# Altium PCB PCB_Negativo.PcbDoc
Units mm, origin at the board's own origin, x right, y up, seen from the top; angles counter-clockwise.
Board outline 111.51 x 148.08 mm, 3 copper layers (Top Layer, Fill, Bottom Layer), stack 0.488 mm thick; 88 components, 0 nets, 340 pads, 12 vias.
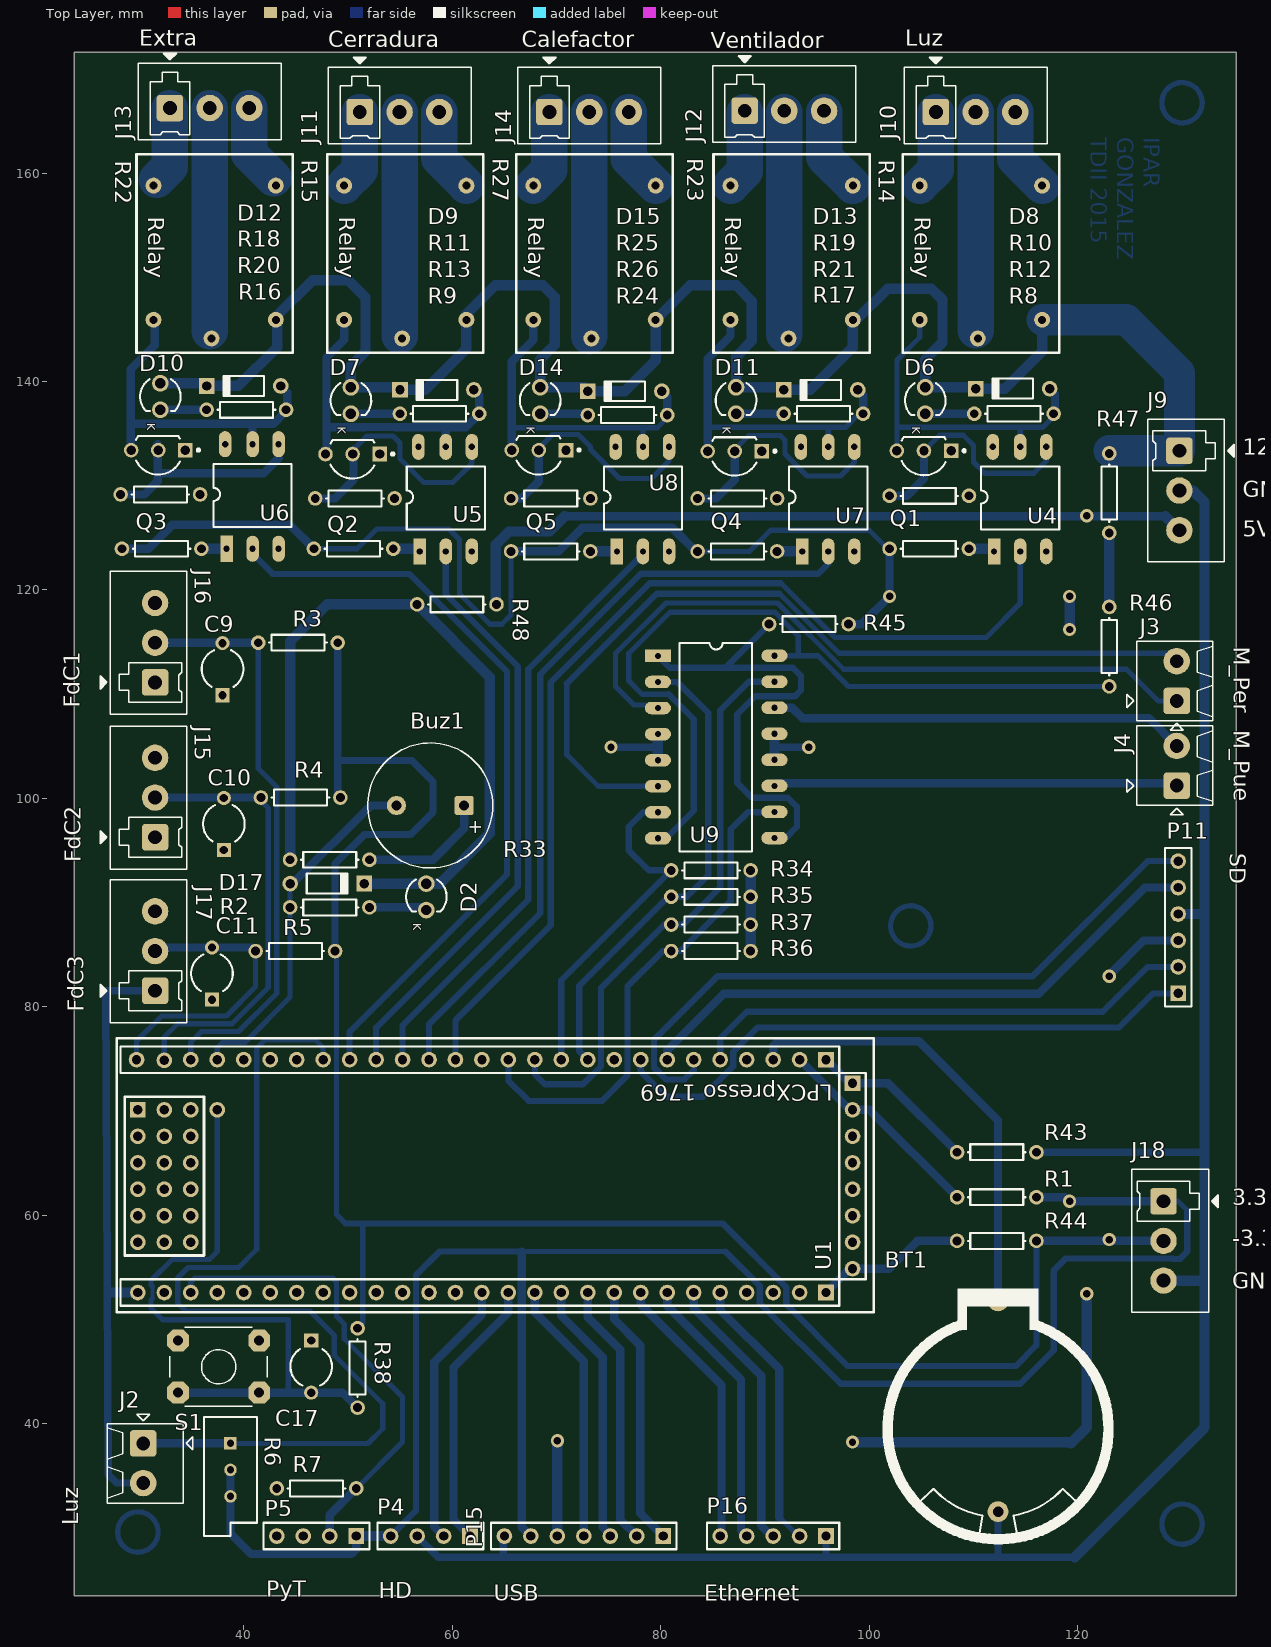
[diagram p0: Top Layer view]
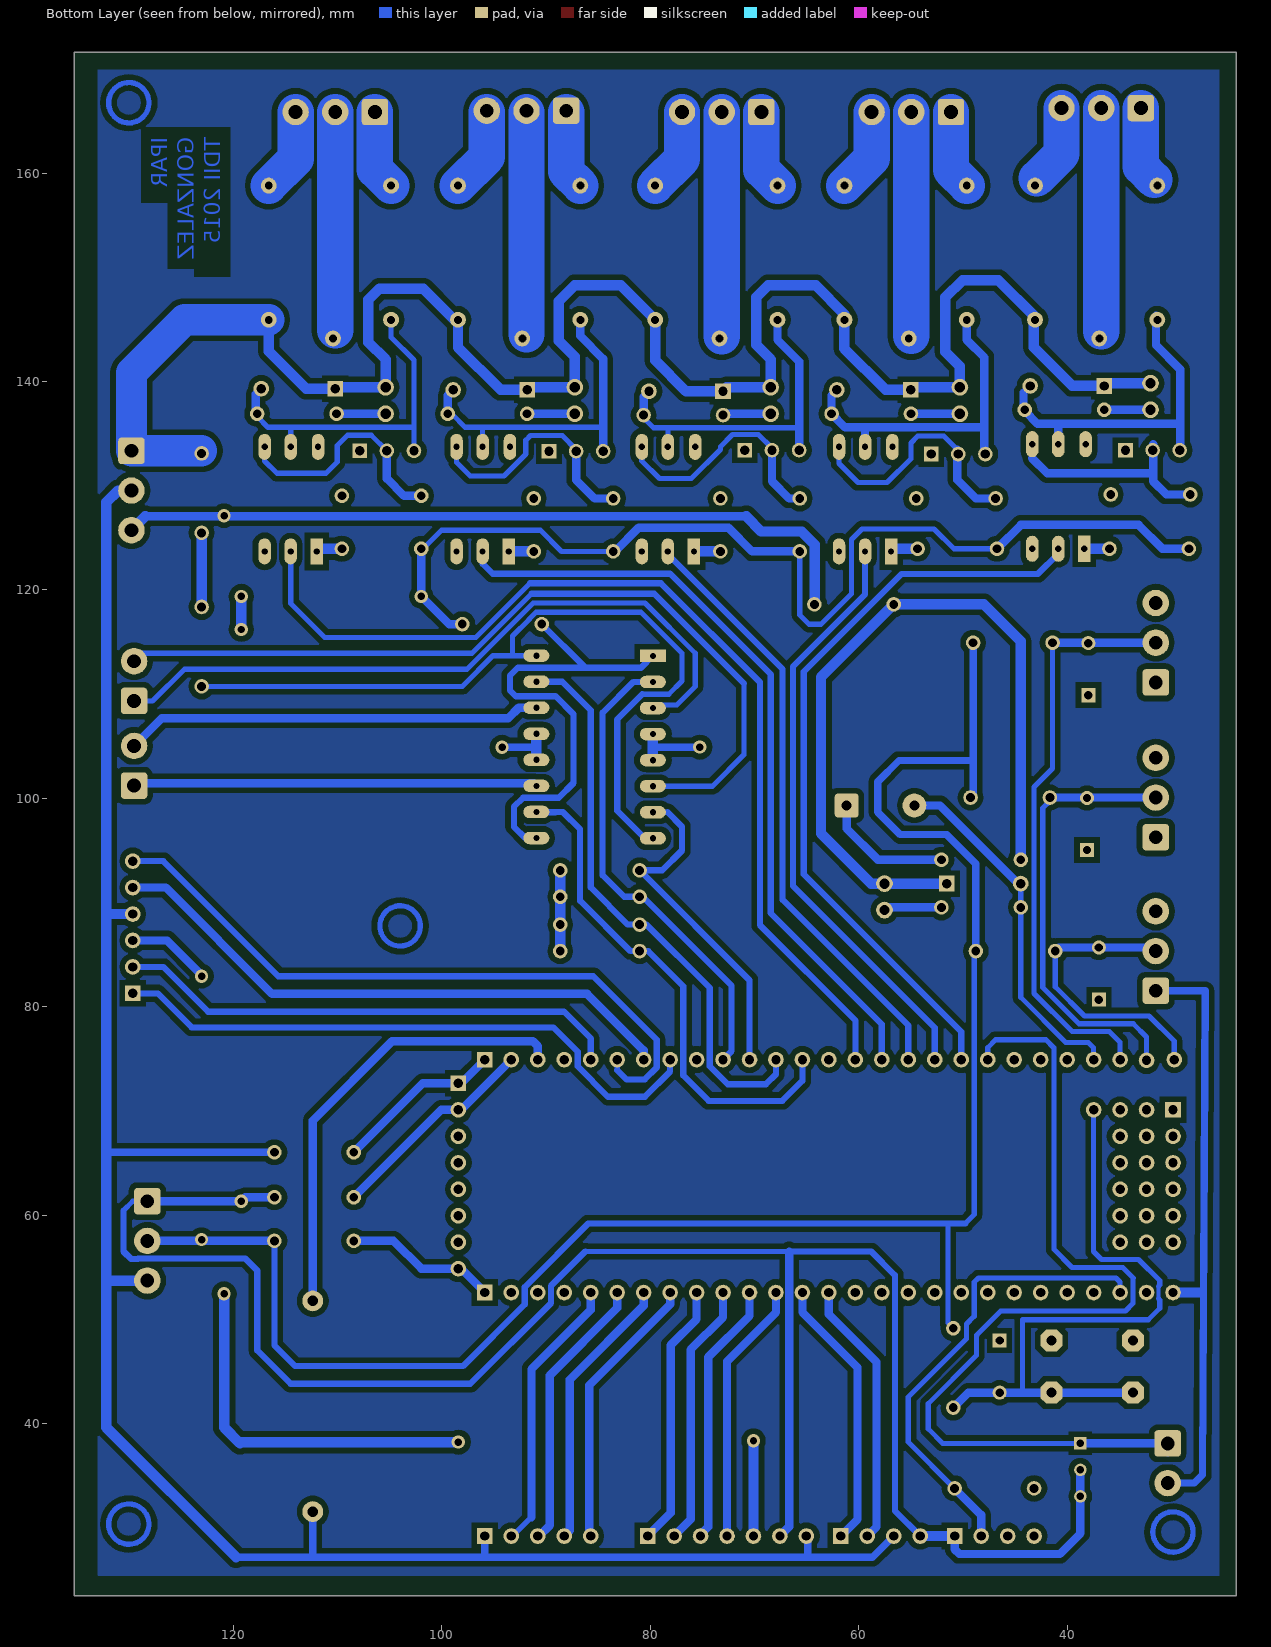
[diagram p1: Bottom Layer view, seen from below]
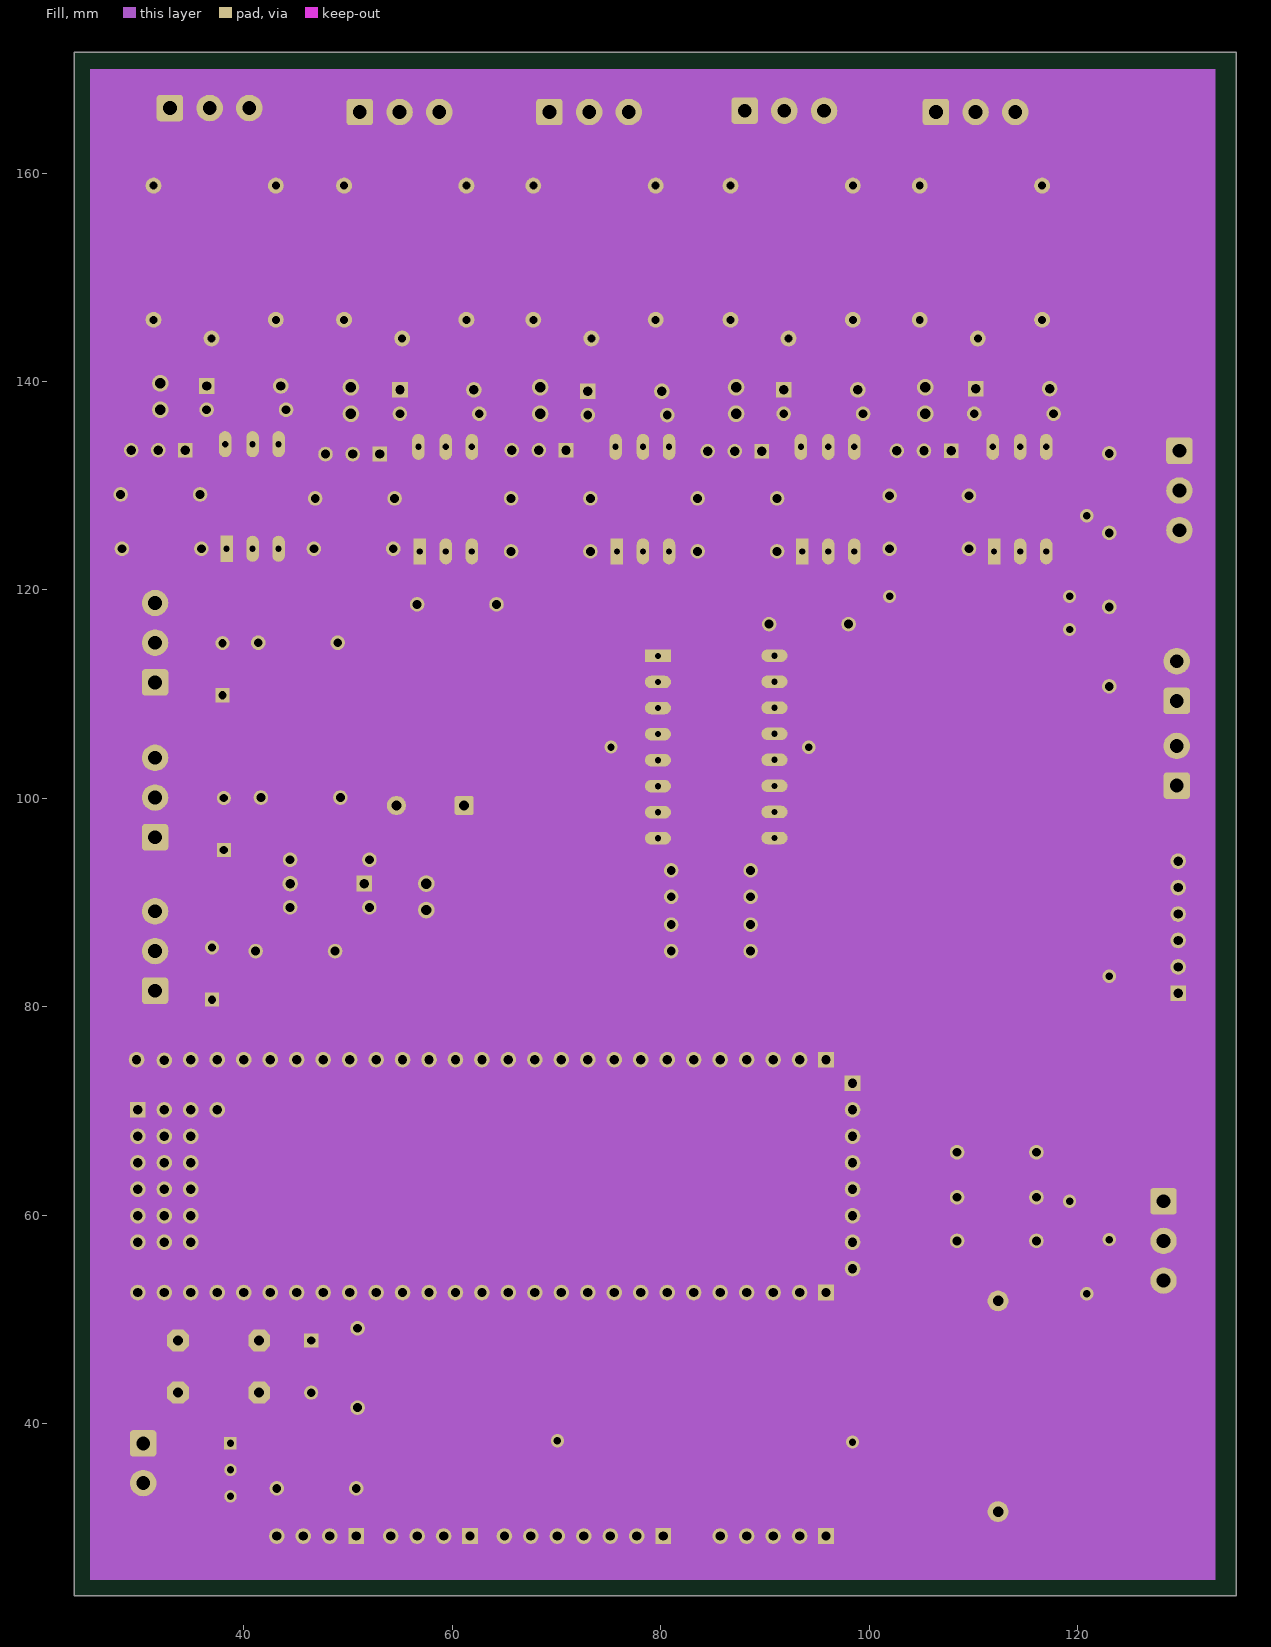
[diagram p2: Fill]

## Layer stack, top to bottom
Top Solder: solder mask 0.0102, Solder Resist, Dk 3.5
Top Layer: signal copper 0.0356
Dielectric 1: core 0.254, FR-4, Dk 4.2
Fill: signal copper 0.036
Dielectric 2: prepreg 0.127, Dk 4.2
Bottom Layer: signal copper 0.0356
Bottom Solder: solder mask 0.0102, Solder Resist, Dk 3.5

## Board outline
23.749,23.495 135.255,23.495 135.255,171.577 23.749,171.577

## Design rules (kind name [scope] priority, off if disabled: settings)
Clearance [All] p1: gap=0.55
PolygonConnect [All] p1: connectstyle=Relief reliefconductorwidth=0.254 reliefentries=4 polygonreliefangle="90 Angle" airgapwidth=0.254
RoutingVias [All] p1: holewidth=0.711 width=1.27 viastyle="Through Hole" minholewidth=0.711 minwidth=1.27 maxholewidth=0.711 maxwidth=1.27
SolderMaskExpansion [All] p1: expansion=0.102
Width [All] p1: maxlimit=3.5 minlimit=0.254 preferedwidth=0.5 midlayer1_maxwidth=0.254 midlayer1_prefwidth=0.254 minimp=50.000000 maximp=50.000000 favimp=50.000000
30 further rules are at their usual default settings.

## Components (designator, comment, footprint, x,y, rotation, side; value= is the part's Value field where it differs from the comment)
BT1 "120591-1" TECO-120591-1-2_V 112.384,39.496 r90 top
Buz1 "Alternate part: 3100-932" BUZZER_12.0X8.5MM 57.901,99.313 r180 top
C9 "Cap2" CAPR5-4X5 37.962,112.394 r90 top
C10 "Cap2" CAPR5-4X5 38.089,97.535 r90 top
C11 "Cap2" CAPR5-4X5 36.946,83.184 r90 top
C17 "Cap2" CAPR5-4X5 46.471,45.465 r270 top
D2 "LED1" "Type 3mm" 57.52,90.55 r270 top
D6 "LED1" "Type 3mm" 105.399,138.175 r270 top
D7 "LED1" "Type 3mm" 50.281,138.175 r270 top
D8 "1N4148" DO-35 113.781,139.318 r180 top
D9 "1N4148" DO-35 58.536,139.191 r180 top
D10 "LED1" "Type 3mm" 31.993,138.556 r270 top
D11 "LED1" "Type 3mm" 87.238,138.175 r270 top
D12 "1N4148" DO-35 39.994,139.572 r180 top
D13 "1N4148" DO-35 95.366,139.191 r180 top
D14 "LED1" "Type 3mm" 68.442,138.175 r270 top
D15 "1N4148" DO-35 76.57,139.064 r180 top
D17 "1N4148" DO-35 47.995,91.82 r0 top
J2 "Stackable ScrewTerm" 2P_PCB_ScrewTerm_90S_3.81MM 30.342,38.099 r180 top
J3 "Stackable ScrewTerm" 2P_PCB_ScrewTerm_90S_3.81MM 129.529,109.346 r0 top
J4 "Stackable ScrewTerm" 2P_PCB_ScrewTerm_90S_3.81MM 129.529,101.218 r0 top
J9 "3P_TERM BLOCK HEADER" 3P_PCB_TERM_BLOCK_HDR 129.783,129.539 r0 top
J10 "3P_TERM BLOCK HEADER" 3P_PCB_TERM_BLOCK_HDR 110.225,165.861 r90 top
J11 "3P_TERM BLOCK HEADER" 3P_PCB_TERM_BLOCK_HDR 54.948,165.861 r90 top
J12 "3P_TERM BLOCK HEADER" 3P_PCB_TERM_BLOCK_HDR 91.873,165.988 r90 top
J13 "3P_TERM BLOCK HEADER" 3P_PCB_TERM_BLOCK_HDR 36.724,166.242 r90 top
J14 "3P_TERM BLOCK HEADER" 3P_PCB_TERM_BLOCK_HDR 73.141,165.861 r90 top
J15 "3P_TERM BLOCK HEADER" 3P_PCB_TERM_BLOCK_HDR 31.485,100.075 r180 top
J16 "3P_TERM BLOCK HEADER" 3P_PCB_TERM_BLOCK_HDR 31.485,114.934 r180 top
J17 "3P_TERM BLOCK HEADER" 3P_PCB_TERM_BLOCK_HDR 31.485,85.343 r180 top
J18 "3P_TERM BLOCK HEADER" 3P_PCB_TERM_BLOCK_HDR 128.259,57.53 r0 top
P4 "Huella Digital" HDR1X4 61.711,29.209 r180 top
P5 "Sensor Temp y Pres" HDR1X4 50.789,29.209 r180 top
P11 "Salida" HDR1X6 129.656,81.279 r90 top
P15 "Header 7" HDR1X7 80.253,29.209 r180 top
P16 "Header 5" HDR1X5 95.874,29.209 r180 top
Q1 "2N5551RL1G" ONSC-TO-92-3-29-11_AM_BL 105.272,133.349 r180 top
Q2 "2N5551RL1G" ONSC-TO-92-3-29-11_AM_BL 50.442,133.04 r180 top
Q3 "2N5551RL1G" ONSC-TO-92-3-29-11_AM_BL 31.792,133.415 r180 top
Q4 "2N5551RL1G" ONSC-TO-92-3-29-11_AM_BL 87.117,133.315 r180 top
Q5 "2N5551RL1G" ONSC-TO-92-3-29-11_AM_BL 68.317,133.415 r180 top
R1 "Res1" AXIAL-0.3 112.257,61.721 r0 top
R2 "Res1" AXIAL-0.3 48.249,89.534 r0 top
R3 "Res1" AXIAL-0.3 45.201,114.934 r0 top
R4 "Res1" AXIAL-0.3 45.455,100.075 r0 top
R5 "Res1" AXIAL-0.3 44.947,85.343 r0 top
R6 "RPot" VR5 38.724,35.559 r270 top
R7 "Res1" AXIAL-0.3 46.979,33.781 r0 top
R8 "Res1" AXIAL-0.3 105.78,123.951 r180 top
R9 "Res1" AXIAL-0.3 50.535,123.951 r180 top
R10 "Res1" AXIAL-0.3 113.908,136.905 r180 top
R11 "Res1" AXIAL-0.3 58.79,136.905 r180 top
R12 "Res1" AXIAL-0.3 105.78,129.031 r180 top
R13 "Res1" AXIAL-0.3 50.662,128.777 r180 top
R14 "Relay-12VDC" Rele 103.24,161.797 r270 top
R15 "Relay-12VDC" Rele 47.995,161.797 r270 top
R16 "Res1" AXIAL-0.3 32.12,123.951 r180 top
R17 "Res1" AXIAL-0.3 87.365,123.697 r180 top
R18 "Res1" AXIAL-0.3 40.248,137.286 r180 top
R19 "Res1" AXIAL-0.3 95.62,136.905 r180 top
R20 "Res1" AXIAL-0.3 31.993,129.158 r180 top
R21 "Res1" AXIAL-0.3 87.365,128.777 r180 top
R22 "Relay-12VDC" Rele 29.707,161.797 r270 top
R23 "Relay-12VDC" Rele 85.079,161.797 r270 top
R24 "Res1" AXIAL-0.3 69.458,123.697 r180 top
R25 "Res1" AXIAL-0.3 76.824,136.778 r180 top
R26 "Res1" AXIAL-0.3 69.458,128.777 r180 top
R27 "Relay-12VDC" Rele 66.156,161.797 r270 top
R33 "Res1" AXIAL-0.3 48.249,94.106 r180 top
R34 "Res1" AXIAL-0.3 84.825,93.09 r180 top
R35 "Res1" AXIAL-0.3 84.825,90.55 r0 top
R36 "Res1" AXIAL-0.3 84.825,85.343 r180 top
R37 "Res1" AXIAL-0.3 84.825,87.883 r0 top
R38 "Res1" AXIAL-0.3 50.916,45.338 r90 top
R43 "Res1" AXIAL-0.3 112.257,66.039 r0 top
R44 "Res1" AXIAL-0.3 112.257,57.53 r0 top
R45 "Res1" AXIAL-0.3 94.223,116.712 r0 top
R46 "Res1" AXIAL-0.3 123.052,114.553 r90 top
R47 "Res1" AXIAL-0.3 123.052,129.285 r90 top
R48 "Res1" AXIAL-0.3 60.441,118.617 r0 top
S1 "SW_THT_PB_5.0mm" TACT-SWITCH-TC-37XB 37.581,45.465 r180 top
U1 "LPCXPRESSO1769" Stick 95.874,53.847 r180 top
U4 "4N25" DIP6 112.003,123.697 r90 top
U5 "4N25" DIP6 56.885,123.697 r90 top
U6 "4N25" DIP6 38.343,123.951 r90 top
U7 "4N25" DIP6 93.588,123.697 r90 top
U8 "4N25" DIP6 75.808,123.697 r90 top
U9 "L293D" DIP16 79.745,113.664 r0 top

## Footprints (in the part's own frame and the unit in brackets; to place one, negate y for a bottom-side part, rotate by r counter-clockwise, add the part's x,y. Pads: shape width x height; smd on the part's side, far side on the other; paste and mask are expansions set on the pad)
2P_PCB_ScrewTerm_90S_3.81MM [mil] "TERM BLOCK 2POS SIDE ENT STACKABLE 3.81MM"
  rrect25% 100x100 hole 52: 1(0,0)
  round 100 hole 52: 2(0,150)
  silkscreen extent -188,-110 136,226, body extent -152,-75 136,225, height 335
3P_PCB_TERM_BLOCK_HDR [mil] "TERM BLOCK HDR 3POS 3.81MM"
  rrect25% 100x100 hole 52: 1(0,150)
  round 100 hole 52: 2(0,0) 3(0,-150)
  silkscreen extent -120,-270 207,270, body extent -118,-270 167,270, height 362
AXIAL-0.3 [mm] "Axial Device, Thru-Hole; 2 Leads; 0.3 in Pin Spacing"
  round 1.4 hole 0.85: 1(-3.81,0) 2(3.81,0)
  silkscreen extent -2.77,-0.76 2.77,0.76
BUZZER_12.0X8.5MM [mil]
  round 20 on Mech15: 0(0,0)
  rrect25% 72x72 / inner rrect25% 72x72 / far side rrect25% 90x90 hole 38: 1(-127.95,0)
  round 72 / inner round 72 / far side round 90 hole 38: 2(127.95,0)
  silkscreen extent -236,-236 236,236, body extent -246,-246 246,246, height 354
CAPR5-4X5 [mm] "Capacitor; 2 Leads"
  rect 1.35x1.35 hole 0.8: 1(-2.5,0)
  round 1.35 hole 0.8: 2(2.5,0)
  silkscreen extent -1.69,-2 1.82,2
DIP6 [mm]
  rect 2.5x1.2 hole 0.6: 1(0,0)
  oval 2.5x1.2 hole 0.6: 2(0,-2.5) 3(0,-5) 4(10.033,-5) 5(10.033,-2.5) 6(10.033,0.127)
  silkscreen extent 2.08,-6.25 8.13,1.25
DIP16 [mm]
  rect 2.5x1.2 hole 0.6: 1(0,0)
  oval 2.5x1.2 hole 0.6: 2(0,-2.5) 3(0,-5) 4(0,-7.5) 5(0,-10) 6(0,-12.5) 7(0,-15) 8(0,-17.5) 9(11.18,-17.474) 10(11.18,-14.974) 11(11.18,-12.474) 12(11.18,-9.974) 13(11.18,-7.474) 14(11.18,-4.974) 15(11.18,-2.474) 16(11.18,0.026)
  silkscreen extent 2.08,-18.75 9.02,1.25
DO-35 [mm] "Diode, Axial; Body 3.8 x 1.9 mm (LxDia. max), Lead Dia. 0.53 mm (max)"
  round 1.5 hole 0.9: 1(-3.55,0)
  rect 1.5x1.5 hole 0.9: 2(3.55,0)
  silkscreen extent -1.95,-0.95 2.05,0.95
HDR1X4 [mm] "Connector; Header; 4 Position"
  rect 1.5x1.5 hole 0.9: 1(0,0)
  round 1.5 hole 0.9: 2(2.54,0) 3(5.08,0) 4(7.62,0)
  silkscreen extent -1.27,-1.27 8.89,1.27
HDR1X5 [mm] "Connector; Header; 5 Position"
  rect 1.5x1.5 hole 0.9: 1(0,0)
  round 1.5 hole 0.9: 2(2.54,0) 3(5.08,0) 4(7.62,0) 5(10.16,0)
  silkscreen extent -1.27,-1.27 11.43,1.27
HDR1X6 [mm] "Connector; Header; 6 Position"
  rect 1.5x1.5 hole 0.9: 1(0,0)
  round 1.5 hole 0.9: 2(2.54,0) 3(5.08,0) 4(7.62,0) 5(10.16,0) 6(12.7,0)
  silkscreen extent -1.27,-1.27 13.97,1.27
HDR1X7 [mm] "Connector; Header; 7 Position"
  rect 1.5x1.5 hole 0.9: 1(0,0)
  round 1.5 hole 0.9: 2(2.54,0) 3(5.08,0) 4(7.62,0) 5(10.16,0) 6(12.7,0) 7(15.24,0)
  silkscreen extent -1.27,-1.27 16.51,1.27
ONSC-TO-92-3-29-11_AM_BL [mm] "TO, 3-Leads, Body Dia 4.7mm, Pitch 2.6mm"
  rect 1.4x1.4 hole 0.9: 1(-2.6,0)
  round 1.4 hole 0.9: 2(0,0) 3(2.6,0)
  silkscreen extent -3.98,-1.34 2.13,2.35, body extent -2.84,-1.34 2.84,2.35, height 5.33
Rele [mil] "Rele - 5pin"
  round 60 hole 30: 1(118.11,64.17) 2(695.67,283.46) 3(118.11,526.38) 4(625,526.38) 5(625,64.17)
  silkscreen extent 0,0 750,591
Stick [mm] "Connector; Header Stick"
  rect 1.5x1.5 hole 0.9: 1(0,-21.082) 28(0,1.27) 68(66.04,-16.256) 74(-2.54,-18.796)
  round 1.5 hole 0.9: 2(2.54,-21.082) 3(5.08,-21.082) 4(7.62,-21.082) 5(10.16,-21.082) 6(12.7,-21.082) 7(15.24,-21.082) 8(17.78,-21.082) 9(20.32,-21.082) 10(22.86,-21.082) 11(25.4,-21.082) 12(27.94,-21.082) 13(30.48,-21.082) 14(33.02,-21.082) 15(35.56,-21.082) 16(38.1,-21.082) 17(40.64,-21.082) 18(43.18,-21.082) 19(45.72,-21.082) 20(48.26,-21.082) 21(50.8,-21.082) 22(53.34,-21.082) 23(55.88,-21.082) 24(58.42,-21.082) 25(60.96,-21.082) 26(63.5,-21.008) 27(66.167,-21.082) 29(2.54,1.27) 30(5.08,1.27) 31(7.62,1.27) 32(10.16,1.27) 33(12.7,1.27) 34(15.24,1.27) 35(17.78,1.27) 36(20.32,1.27) 37(22.86,1.27) 38(25.4,1.27) 39(27.94,1.27) 40(30.48,1.27) 41(33.02,1.27) 42(35.56,1.27) 43(38.1,1.27) 44(40.64,1.27) 45(43.18,1.27) 46(45.72,1.27) 47(48.26,1.27) 48(50.8,1.27) 49(53.34,1.27) 50(55.88,1.27) 51(58.42,1.27) 52(60.96,1.27) 53(63.5,1.27) 54(66.04,1.27) 55(58.42,-16.256) 56(60.96,-16.256) 57(60.96,-13.716) 58(60.96,-11.176) 59(60.96,-8.636) 60(60.96,-6.096) 61(60.96,-3.556) 62(63.5,-16.256) 63(63.5,-13.716) 64(63.5,-11.176) 65(63.5,-8.636) 66(63.5,-6.096) 67(63.5,-3.556) 69(66.04,-13.716) 70(66.04,-11.176) 71(66.04,-8.636) 72(66.04,-6.096) 73(66.04,-3.556) 75(-2.54,-16.256) 76(-2.54,-13.716) 77(-2.54,-11.176) 78(-2.54,-8.636) 79(-2.54,-6.096) 80(-2.54,-3.556) 81(-2.54,-1.016)
  silkscreen extent -4.57,-23.11 68.07,3.18
TACT-SWITCH-TC-37XB [mm] "Wealth Metal sealed TH tact switch"
  round 0.508 on Mech15: 0(0,0)
  oct 2.1x2.1 hole 0.965: 1(-3.9,-2.5) 1(3.9,-2.5) 2(-3.9,2.5) 2(3.9,2.5)
  silkscreen extent -4.67,-3.79 4.67,3.79, body extent -4.46,-3.6 4.46,3.6, height 5
TECO-120591-1-2_V [mm] "Lithium Battery Holder"
  round 2 hole 1: 1(12.275,0) 2(-7.95,0)
  silkscreen extent -10.6,-10.6 13.47,10.6, body extent -10.62,-10.59 13.17,10.63, height 10
"Type 3mm" [mm] "THT, LED-3mm, 2pin- Body 4.15mm(max)"
  round 1.6 hole 1: 1(1.27,0) 2(-1.27,0)
  silkscreen extent -1.66,-1.95 1.4,1.95, body extent -1.93,-1.94 1.87,1.94, height 10.5
VR5 [mm] "Thru-Hole; 3 Leads"
  rect 1.2x1.2 hole 0.7: 1(-2.54,0)
  round 1.2 hole 0.7: 2(0,0) 3(2.54,0)
  silkscreen extent -5.08,-2.54 6.35,2.54

## Part data
BT1: library part CMP-0438-00001-1, "Lithium Battery Holder for CR2032 3V Cell"
Buz1: library part BZ_12x8.5x6.5_2kHz, "Speaker, Magnetic Transducer"
C9 C10 C11 C17: "Capacitor"
D2 D6 D7 D10 D11 D14: library part CMP-1488-00002-1, "THT LED round mono-color color lens, WL-TMRW, Super Red"
D8 D9 D12 D13 D15 D17: library part "Diode 1N4148", "High Conductance Fast Diode"
J2 J3 J4: library part 2P_ScrewTerm_90S_3.81MM, "Terminal Block Screw Type THT 2-Position 3.81mm pitch"
J9 J10 J11 J12 J13 J14 J15 J16 J17 J18: "Terminal Block THT 3-Position header 3.81mm pitch"
P4 P5: library part "Header 4", "Header, 4-Pin"
P11: library part "Header 6", "Header, 6-Pin"
P15: "Header, 7-Pin"
P16: "Header, 5-Pin"
Q1 Q2 Q3 Q4 Q5: library part CMP-1048-01479-1, "Amplifier Transistor, NPN Silicon, 3-Pin TO-92, Pb-Free, Tape and Reel"
R1 R2 R3 R4 R5 R7 R8 R9 R10 R11 R12 R13 R16 R17 R18 R19 R20 R21 R24 R25 R26 R33 R34 R35 R36 R37 R38 R43 R44 R45 R46 R47 R48: "Resistor"
R6: "Potentiometer"
R14 R15 R22 R23 R27: library part Component_1
S1: "Switch, tact, 5.0mm stem"
U1: library part LPC1769_Stick
U4 U5 U6 U7 U8: library part Opto-4N25, "Optoacoplador"
U9: "Texas Quadruple Half-H Drivers"

## Via types
v1: diameter 1.27, hole 0.711, Top Layer to Bottom Layer, 12 vias

## Nets (pads, with @x,y where several pads share a name; then routed paths per layer and width w, separated by ;. In a path a pad name is that pad's centre, name@x,y a point inside that pad or via, vN(x,y) a via of type N, cw(c..) or ccw(c..) an arc to the next point about the centre after c; other vN are vias at no path point)
pads on no net: BT1.1 BT1.2 Buz1.0 Buz1.1 Buz1.2 C9.1 C9.2 C10.1 C10.2 C11.1 C11.2 C17.1 C17.2 D2.1 D2.2 D6.1 D6.2 D7.1 D7.2 D8.1 D8.2 D9.1 D9.2 D10.1 D10.2 D11.1 D11.2 D12.1 D12.2 D13.1 D13.2 D14.1 D14.2 D15.1 D15.2 D17.1 D17.2 J2.1 J2.2 J3.1 J3.2 J4.1 J4.2 J9.1 J9.2 J9.3 J10.1 J10.2 J10.3 J11.1 J11.2 J11.3 J12.1 J12.2 J12.3 J13.1 J13.2 J13.3 J14.1 J14.2 J14.3 J15.1 J15.2 J15.3 J16.1 J16.2 J16.3 J17.1 J17.2 J17.3 J18.1 J18.2 J18.3 P4.1 P4.2 P4.3 P4.4 P5.1 P5.2 P5.3 P5.4 P11.1 P11.2 P11.3 P11.4 P11.5 P11.6 P15.1 P15.2 P15.3 P15.4 P15.5 P15.6 P15.7 P16.1 P16.2 P16.3 P16.4 P16.5 Q1.1 Q1.2 Q1.3 Q2.1 Q2.2 Q2.3 Q3.1 Q3.2 Q3.3 Q4.1 Q4.2 Q4.3 Q5.1 Q5.2 Q5.3 R1.1 R1.2 R2.1 R2.2 R3.1 R3.2 R4.1 R4.2 R5.1 R5.2 R6.1 R6.2 R6.3 R7.1 R7.2 R8.1 R8.2 R9.1 R9.2 R10.1 R10.2 R11.1 R11.2 R12.1 R12.2 R13.1 R13.2 R14.1 R14.2 R14.3 R14.4 R14.5 R15.1 R15.2 R15.3 R15.4 R15.5 R16.1 R16.2 R17.1 R17.2 R18.1 R18.2 R19.1 R19.2 R20.1 R20.2 R21.1 R21.2 R22.1 R22.2 R22.3 R22.4 R22.5 R23.1 R23.2 R23.3 R23.4 R23.5 R24.1 R24.2 R25.1 R25.2 R26.1 R26.2 R27.1 R27.2 R27.3 R27.4 R27.5 R33.1 R33.2 R34.1 R34.2 R35.1 R35.2 R36.1 R36.2 R37.1 R37.2 R38.1 R38.2 R43.1 R43.2 R44.1 R44.2 R45.1 R45.2 R46.1 R46.2 R47.1 R47.2 R48.1 R48.2 S1.0 S1.1 S1.2 U1.1 U1.2 U1.3 U1.4 U1.5 U1.6 U1.7 U1.8 U1.9 U1.10 U1.11 U1.12 U1.13 U1.14 U1.15 U1.16 U1.17 U1.18 U1.19 U1.20 U1.21 U1.22 U1.23 U1.24 U1.25 U1.26 U1.27 U1.28 U1.29 U1.30 U1.31 U1.32 U1.33 U1.34 U1.35 U1.36 U1.37 U1.38 U1.39 U1.40 U1.41 U1.42 U1.43 U1.44 U1.45 U1.46 U1.47 U1.48 U1.49 U1.50 U1.51 U1.52 U1.53 U1.54 U1.55 U1.56 U1.57 U1.58 U1.59 U1.60 U1.61 U1.62 U1.63 U1.64 U1.65 U1.66 U1.67 U1.68 U1.69 U1.70 U1.71 U1.72 U1.73 U1.74 U1.75 U1.76 U1.77 U1.78 U1.79 U1.80 U1.81 U4.1 U4.2 U4.3 U4.4 U4.5 U4.6 U5.1 U5.2 U5.3 U5.4 U5.5 U5.6 U6.1 U6.2 U6.3 U6.4 U6.5 U6.6 U7.1 U7.2 U7.3 U7.4 U7.5 U7.6 U8.1 U8.2 U8.3 U8.4 U8.5 U8.6 U9.1 U9.2 U9.3 U9.4 U9.5 U9.6 U9.7 U9.8 U9.9 U9.10 U9.11 U9.12 U9.13 U9.14 U9.15 U9.16
copper on no net: | length 3556.8
  Bottom Layer w0.3: 48.757,85.343 48.9,85.2
  Bottom Layer w0.4: 31.234,51.997 31.234,53.157
  Bottom Layer w0.5: 29.707,74.929 29.707,76.707 32.124,79.124 38.338,79.124 41.137,81.923 41.137,85.343 40.796,85.684 ; 30.342,37.083 31.358,38.099 ; 31.234,51.997 31.104,51.867 31.104,51.069 32.212,49.96 44.267,49.96 44.267,43.04 ; 31.234,53.157 31.104,53.287 31.104,53.72 33.136,55.752 34.025,55.752 35.803,55.752 36.692,55.752 37.454,56.514 37.454,70.103 ; 32.374,74.855 32.374,77.088 33.656,78.37 38.863,78.37 42.341,81.848 42.341,99.059 41.645,99.755 41.645,100.075 ; 34.914,52.577 34.914,53.593 35.295,53.974 48.503,53.974 48.9,53.577 48.9,50.307 49.646,49.561 49.646,48.132 55.234,42.544 55.234,38.226 50.789,33.781 ; 34.914,74.929 34.914,76.584 35.946,77.616 39.506,77.616 43.169,81.279 43.169,101.091 41.391,102.869 41.391,114.934 ; 37.454,74.929 37.454,76.072 37.962,76.58 40.121,76.58 44.445,80.904 44.445,91.82 44.693,91.82 ; 38.724,38.099 51.932,38.099 53.329,39.496 53.329,41.909 48.682,46.555 48.682,48.424 48.667,48.44 48.667,48.49 46.358,50.799 34.406,50.799 33.66,51.545 33.66,53.958 33.644,53.974 34.66,54.99 39.517,54.99 41.248,56.721 41.248,76.056 42.026,76.834 46.852,76.834 47.614,76.072 47.614,74.929 ; 40.799,134.027 40.843,133.984 ; 40.843,123.483 40.843,123.951 ; 43.343,132.634 43.343,133.984 ; 43.544,139.572 44.179,138.937 ; 44.058,137.159 44.058,137.286 44.179,137.407 ; 46.471,42.965 47.908,42.965 ; 46.725,123.951 50.854,123.951 52.759,125.856 59.679,125.856 60.695,124.84 60.695,119.633 63.616,116.712 64.759,116.712 65.648,117.601 65.648,123.697 ; 48.9,85.2 48.9,60.07 49.773,59.197 ; 49.011,100.329 49.265,100.075 49.265,100.329 ; 50.535,133.476 51.833,134.774 52.454,134.774 53.696,134.774 54.317,134.774 ; 50.916,49.148 51.17,49.402 ; 51.424,49.656 51.424,59.197 ; 51.594,135.601 51.62,135.627 ; 54.321,134.769 54.98,134.111 54.98,132.587 57.266,130.301 60.06,130.301 61.885,132.126 61.885,133.73 ; 54.53,135.627 54.556,135.601 ; 57.266,89.534 57.52,89.28 ; 59.353,133.762 59.385,133.73 ; 62.086,139.191 62.6,138.677 ; 65.902,135.561 79.671,135.561 80.634,136.524 80.634,136.778 ; 66.664,56.514 86.222,56.514 ; 68.315,133.603 69.627,134.915 72.092,134.915 73.268,133.739 73.268,133.476 76.062,130.682 79.11,130.682 80.808,132.38 80.808,133.73 ; 70.992,111.007 70.992,104.19 74.018,101.164 79.745,101.164 ; 78.308,123.403 78.308,123.697 ; 78.308,133.73 78.308,135.561 ; 78.334,98.664 79.745,98.664 ; 79.745,96.164 80.533,96.164 ; 79.745,108.664 79.444,108.965 77.459,108.965 75.681,110.743 75.681,113.918 80.507,118.744 91.225,118.744 97.575,112.394 124.703,112.394 127.751,109.346 129.529,109.346 ; 80.12,139.064 80.634,138.55 ; 80.195,85.343 81.015,85.343 ; 80.36,87.883 81.015,87.883 ; 80.727,90.55 81.015,90.55 ; 80.761,109.981 78.221,109.981 76.951,111.251 76.951,113.918 80.888,117.855 90.973,117.855 91.617,117.211 91.617,117.159 93.207,115.569 93.207,113.69 ; 83.174,73.913 83.174,74.929 ; 83.385,123.697 83.555,123.697 88.508,123.697 90.54,125.729 100.022,125.729 101.8,123.951 101.97,123.951 ; 84.698,135.601 97.745,135.601 99.049,136.905 99.43,136.905 ; 86.349,112.521 86.349,112.648 ; 87.111,133.476 88.45,134.815 91.487,134.815 91.937,134.365 91.937,133.043 94.044,130.936 97.271,130.936 98.588,132.253 98.588,133.73 ; 89.08,98.69 89.118,98.653 ; 90.888,98.653 90.925,98.69 ; 90.925,96.19 91.989,96.19 ; 90.925,101.19 91.176,101.441 ; 90.925,113.69 93.207,113.69 ; 91.392,31.024 93.207,29.209 ; 91.403,119.633 97.118,113.918 128.767,113.918 129.529,113.156 ; 91.539,120.64 96.737,115.442 111.241,115.442 114.503,118.704 114.503,123.697 ; 96.088,122.514 96.088,123.697 ; 96.088,133.73 96.088,135.514 ; 98.16,54.863 98.414,54.863 ; 98.16,70.103 98.414,70.103 ; 98.16,72.643 98.414,72.643 ; 98.916,139.191 99.43,138.677 ; 102.672,133.349 102.672,142.052 104.87,144.25 104.87,145.922 ; 102.859,135.601 116.668,135.601 117.718,136.651 117.718,136.905 117.845,137.032 ; 105.272,133.349 106.772,134.849 109.04,134.849 110.032,133.857 110.032,132.267 111.109,131.19 115.813,131.19 117.003,132.38 117.003,133.73 ; 114.503,133.73 114.503,135.561 ; 117.331,139.318 117.845,138.804 ; 123.052,110.743 98.033,110.743 95.086,113.69 93.207,113.69 ; 128.259,61.34 129.656,61.34 130.545,60.451 ; 129.137,55.84 129.187,55.79 ; 31.768,29.59 ccw(c29.834,29.59) 31.768,29.59 ; 105.936,87.756 ccw(c104.002,87.756) 105.936,87.756 ; 131.971,30.352 ccw(c130.037,30.352) 131.971,30.352 ; 131.971,166.75 ccw(c130.037,166.75) 131.971,166.75
  Bottom Layer w0.6: 40.843,123.483 42.788,121.538 55.869,121.538 65.267,112.14 65.267,92.709 50.154,77.596 50.154,74.929 ; 49.773,59.197 85.947,59.197 92.048,53.096 92.048,51.434 97.967,45.515 114.085,45.515 116.067,47.497 116.067,57.53 ; 52.694,74.929 52.694,77.977 66.295,91.578 66.295,112.662 59.385,119.572 59.385,123.697 ; 54.091,29.209 56.52,31.638 56.52,54.244 58.79,56.514 66.664,56.514 ; 55.234,74.929 55.234,78.207 67.299,90.272 67.299,112.394 78.308,123.403 ; 57.774,74.929 57.774,78.322 68.442,88.99 68.442,111.886 78.096,121.54 95.114,121.54 96.088,122.514 ; 60.314,74.929 60.314,78.687 69.466,87.839 69.466,111.132 78.974,120.64 91.539,120.64 ; 65.394,74.929 65.394,72.897 67.326,70.965 74.384,70.965 76.824,73.405 76.824,81.972 80.195,85.343 ; 67.934,74.929 67.934,73.532 68.901,72.565 72.555,72.565 74.284,74.294 74.284,81.807 80.36,87.883 ; 70.474,74.929 70.474,82.549 81.015,93.09 78.856,93.09 76.951,94.995 76.951,97.281 78.334,98.664 ; 70.992,111.007 79.618,119.633 91.403,119.633 ; 73.014,74.929 72.192,75.751 72.192,82.015 80.727,90.55 ; 78.094,74.929 78.094,73.786 80.507,71.373 84.063,71.373 86.967,74.277 86.967,75.674 89.308,78.015 123.992,78.015 127.256,81.279 129.656,81.279 ; 79.745,111.164 81.61,111.164 84.571,108.203 84.571,92.619 82.502,90.55 81.015,90.55 ; 79.745,113.664 80.888,112.521 86.349,112.521 92.699,112.521 93.461,111.759 93.461,110.362 92.893,109.794 89.083,109.794 87.365,108.076 87.365,101.472 88.772,100.065 92.201,100.065 93.08,99.186 93.08,97.281 91.989,96.19 ; 80.533,96.164 83.174,98.805 83.174,107.568 80.761,109.981 ; 81.015,85.343 81.895,85.343 86.73,90.178 86.73,97.027 88.393,98.69 89.08,98.69 ; 81.015,87.883 82.148,87.883 85.714,91.449 85.714,108.457 88.447,111.19 90.925,111.19 ; 83.174,73.913 82.285,73.024 80.507,73.024 79.364,74.167 79.364,76.834 85.46,82.93 115.686,82.93 126.735,93.979 129.656,93.979 ; 85.714,74.929 85.714,76.961 88.268,79.515 122.431,79.515 126.735,83.819 129.656,83.819 ; 86.222,56.514 89.524,53.212 89.524,51.561 97.271,43.814 114.516,43.814 117.717,47.015 117.717,54.69 118.867,55.84 129.137,55.84 ; 86.349,112.648 90.413,116.712 ; 89.118,98.653 90.888,98.653 ; 129.187,55.79 129.821,55.79 130.545,56.514 130.545,60.451
  Bottom Layer w0.7: 30.342,34.289 27.802,34.289 27.006,35.085 26.752,81.533 31.485,81.533 ; 48.757,85.343 48.757,93.725 51.551,96.519 55.996,96.519 58.155,98.678 58.155,101.599 56.123,103.631 49.011,103.631 ; 49.011,100.329 49.011,114.934 ; 56.631,29.209 58.663,27.177 95.874,27.177 ; 64.886,27.177 64.886,29.209 ; v1(75.242,104.915) 79.72,104.915 ; 90.975,104.89 v1(94.217,104.89) ; 95.874,29.209 95.874,27.177 ; 112.384,27.431 112.384,31.546 ; 116.067,66.039 132.069,66.039 ; 119.75,27.177 95.874,27.177 ; 132.196,118.871 132.196,118.998
  Bottom Layer w0.8: 28.183,129.158 30.469,129.158 31.739,130.428 31.739,133.984 ; 28.31,123.951 30.85,123.951 33.136,126.237 44.439,126.237 46.725,123.951 ; 29.139,133.984 29.139,141.163 31.464,143.488 31.464,146.303 ; 29.199,135.942 42.841,135.942 44.058,137.159 ; 31.358,38.099 38.724,38.099 ; 31.485,85.684 36.946,85.684 40.796,85.684 ; 31.485,100.075 41.645,100.075 ; 31.485,114.934 41.391,114.934 ; 31.739,131.19 41.899,131.19 43.343,132.634 ; 31.993,137.286 36.438,137.286 ; 33.681,42.965 41.481,42.965 46.471,42.965 49.479,42.965 50.916,41.528 ; 38.724,35.559 38.724,33.019 38.724,29.463 40.697,27.49 50.34,27.49 50.789,27.939 50.789,29.209 ; 40.843,133.984 40.843,135.855 ; 44.179,137.407 44.179,138.937 ; 44.693,91.82 52.186,99.313 54.651,99.313 ; 46.852,128.777 48.757,128.777 50.535,130.555 50.535,133.476 ; 47.935,133.476 47.935,142.306 49.625,143.996 49.625,145.922 ; 48.122,135.601 51.594,135.601 ; 48.249,29.209 48.249,31.241 50.789,33.781 ; 50.281,136.905 54.98,136.905 ; 51.62,135.627 54.53,135.627 ; 52.059,89.534 57.266,89.534 ; 52.059,94.106 58.155,94.106 61.151,97.102 61.151,99.313 ; 54.556,135.601 61.296,135.601 62.6,136.905 62.6,138.677 ; 59.171,29.209 58.292,30.088 58.292,45.915 62.854,50.477 62.854,52.577 ; 59.385,133.73 59.385,135.561 ; 61.711,29.209 60.117,30.803 60.117,45.395 65.394,50.672 65.394,52.577 ; 65.648,123.697 70.22,123.697 72.488,125.965 81.117,125.965 83.385,123.697 ; 65.648,128.777 66.664,128.777 68.315,130.428 68.315,133.603 ; 65.715,133.603 65.715,141.925 67.786,143.996 67.786,145.922 ; 66.664,56.514 66.664,30.098 67.553,29.209 ; 67.934,52.577 67.934,50.672 72.633,45.973 72.633,29.209 ; 68.442,136.905 72.887,136.905 ; 70.474,52.577 70.474,50.333 74.442,46.365 74.442,30.067 75.3,29.209 ; 70.794,127.065 128.447,127.065 ; 73.014,52.577 73.014,50.193 76.117,47.09 76.117,30.805 77.713,29.209 ; 75.554,52.577 75.554,50.003 78.042,47.515 78.042,31.42 80.253,29.209 ; 78.094,52.577 78.094,51.434 85.841,43.687 85.841,29.209 ; 80.634,52.577 80.634,51.307 87.717,44.224 87.717,29.746 88.254,29.209 ; 80.634,74.929 80.634,75.818 86.056,81.24 116.282,81.24 126.481,91.439 129.656,91.439 ; 80.634,136.778 80.634,138.55 ; 83.174,52.577 83.174,51.083 89.642,44.615 89.642,30.234 90.667,29.209 ; 83.555,128.777 85.333,128.777 87.111,130.555 87.111,133.476 ; 84.511,133.476 84.511,142.179 86.709,144.377 86.709,145.922 ; 85.714,52.577 85.714,50.893 91.392,45.215 91.392,31.024 ; 87.238,136.905 91.81,136.905 ; 90.794,74.929 90.794,76.217 91.267,76.69 104.781,76.69 112.384,69.087 112.384,51.771 ; 90.925,108.69 92.617,108.69 93.617,107.69 126.867,107.69 129.529,105.028 ; 91.176,101.441 129.529,101.441 ; 93.334,74.929 98.16,70.103 ; 95.874,52.577 98.16,54.863 ; 95.874,74.929 98.16,72.643 ; 98.033,116.712 99.303,116.712 v1(101.97,119.379) 101.97,123.951 ; 98.414,54.863 101.97,54.863 104.637,57.53 108.447,57.53 ; 98.414,70.103 100.065,70.103 108.447,61.721 ; 98.414,72.643 101.843,72.643 108.447,66.039 ; 99.43,136.905 99.43,138.677 ; 101.97,129.031 103.621,129.031 105.272,130.682 105.272,133.349 ; 105.399,136.905 110.098,136.905 ; 116.067,57.53 128.259,57.53 ; 116.067,61.721 v1@118.861,61.721 ; 117.845,137.032 117.845,138.804 ; v1(119.242,61.34) 128.259,61.34 ; v1@123.052,83.057 126.354,86.359 129.656,86.359
  Bottom Layer w1: 27.133,52.577 29.834,52.577 ; 31.993,139.826 36.19,139.826 ; 35.93,123.951 38.343,123.951 ; 36.444,139.572 39.486,139.572 43.204,143.29 43.204,145.922 ; 43.077,145.922 43.077,146.211 46.598,149.732 50.027,149.732 51.678,148.081 51.678,142.874 50.281,141.477 50.281,139.445 54.732,139.445 54.986,139.191 57.393,139.191 61.365,143.163 61.365,145.922 61.365,146.465 64.124,149.224 68.696,149.224 69.839,148.081 69.839,143.509 68.442,142.112 68.442,139.445 72.639,139.445 ; 44.439,94.106 44.439,115.061 47.995,118.617 56.631,118.617 63.616,111.632 63.616,96.646 58.79,91.82 57.52,91.82 51.545,91.82 ; 50.789,29.209 54.091,29.209 ; 54.345,123.951 56.631,123.951 ; 54.948,144.374 55.195,144.127 ; 64.251,118.617 64.194,118.674 64.194,124.356 65.44,125.602 69.331,125.602 70.794,127.065 ; 70.093,29.209 v1(70.093,38.353) ; 73.02,139.064 76.57,139.064 79.526,142.02 79.526,145.922 82.828,149.224 87.238,149.224 88.762,147.7 88.762,143.89 87.238,142.366 87.238,139.445 91.562,139.445 ; 73.268,123.697 75.808,123.697 ; 79.745,103.664 79.745,106.164 ; 88.635,85.343 88.635,87.883 88.635,90.55 88.635,93.09 ; 90.925,103.69 90.925,106.19 ; 91.108,128.844 91.175,128.777 ; 91.175,123.697 93.588,123.697 ; 91.816,139.191 94.35,139.191 98.449,143.29 98.449,145.922 98.795,145.922 101.779,148.906 105.97,148.906 ; v1(98.414,38.226) 119.242,38.226 119.369,38.099 120.893,39.623 v1(120.893,52.45) ; 106.034,148.843 107.05,147.827 107.05,143.763 105.399,142.112 105.399,139.445 110.104,139.445 ; 109.59,123.951 111.749,123.951 ; 110.231,139.318 113.019,139.318 116.61,142.909 116.61,145.922 ; v1(119.242,116.204) v1(119.242,119.379) ; 119.75,27.177 132.196,39.623 132.196,118.871 ; 123.052,118.363 123.052,125.475 ; 128.259,53.72 131.942,53.72 ; 128.447,127.065 129.783,125.729 ; 129.529,101.218 129.529,101.441 ; 129.656,88.899 131.815,88.899 ; 129.783,129.539 131.053,129.539 132.196,128.396 132.196,118.998
  Bottom Layer w3: 116.61,145.922 124.703,145.922 129.783,140.842 129.783,133.349 123.052,133.349
  Bottom Layer w3.5: 31.641,159.355 32.914,160.628 32.914,166.242 ; 36.724,144.818 36.724,166.242 ; 40.534,166.242 40.534,161.848 42.893,159.489 ; 49.625,158.797 51.138,160.31 51.138,165.861 ; 54.948,144.374 54.948,165.861 ; 58.758,165.861 58.758,161.404 61.365,158.797 ; 67.786,158.797 69.331,160.342 69.331,165.861 ; 73.141,144.342 73.141,165.861 ; 76.951,165.861 76.951,161.372 79.526,158.797 ; 86.709,158.797 88.063,160.151 88.063,165.861 ; 91.873,144.532 91.873,165.861 ; 95.683,165.861 95.683,161.562 98.449,158.797 ; 104.87,158.797 106.415,160.342 106.415,165.861 ; 110.225,144.906 110.225,165.861 ; 114.035,165.861 114.035,161.372 116.61,158.797
  other v1: 123.052,57.657 123.052,82.93 120.893,127.126

## Polygon pours and split planes (outlines as drawn)
no net on Bottom Layer "GND_BB" (solid, pour order 7): 25.389,169.925 133.017,169.925 133.017,25.458 132.958,25.399 25.389,25.399

## Other copper
Fill:
  rectangle: 25.25,25 133.25,170
Bottom Layer:
  text "TDII 2015" at 121.274,163.448 h1.52 r270
  text "GONZALEZ" at 123.814,163.448 h1.52 r270
  text "IPAR" at 126.354,163.448 h1.52 r270

## Silkscreen, mask and mechanical layers (free items; w line width, h text height)
Top Overlay:
  text "Extra" at 29.961,172.211 h1.52
  text "Luz" at 103.494,172.211 h1.52
  text "Cerradura" at 48.122,172.084 h1.52
  text "Calefactor" at 66.664,172.084 h1.52
  text "Ventilador" at 84.825,171.957 h1.52
  text "12V" at 135.879,132.968 h1.52
  text "GND" at 135.879,128.904 h1.52
  text "5V" at 135.879,125.094 h1.52
  text "M_Per" at 134.99,114.553 h1.52 r270
  text "FdC1" at 24.246,108.711 h1.52 r90
  text "M_Pue" at 134.99,106.552 h1.52 r270
  text "SD" at 134.609,94.741 h1.52 r270
  text "FdC2" at 24.373,93.852 h1.52 r90
  text "FdC3" at 24.627,79.501 h1.52 r90
  text "3.3V" at 134.863,60.959 h1.52
  text "-3.3V" at 134.863,57.022 h1.52
  text "GND" at 134.863,52.958 h1.52
  text "Luz" at 24.119,30.225 h1.52 r90
  text "PyT" at 42.153,23.367 h1.52
  text "HD" at 52.948,23.24 h1.52
  text "USB" at 63.997,22.986 h1.52
  text "Ethernet" at 84.19,22.986 h1.52
Mechanical 1:
  lines w0.5: 101.97,119.379 119.242,119.379 ; 119.242,61.34 119.242,115.884 ; 123.052,57.657 123.052,82.93
  lines w0.7: 75.267,104.89 94.217,104.89
  lines w1: 70.093,38.353 98.287,38.353 ; 120.893,52.45 120.893,127.38

## Text inside footprints (layer, text, board x,y; h text height)
Buz1: Top Overlay "+" at 61.201,98.013 h2.29 r270
D2: Top Overlay "K" at 56.25,88.01 h0.76 r270; Mechanical 15 "K" at 56.25,88.01 h0.76 r270
D6: Top Overlay "K" at 104.129,135.635 h0.76 r270; Mechanical 15 "K" at 104.129,135.635 h0.76 r270
D7: Top Overlay "K" at 49.011,135.635 h0.76 r270; Mechanical 15 "K" at 49.011,135.635 h0.76 r270
D10: Top Overlay "K" at 30.723,136.016 h0.76 r270; Mechanical 15 "K" at 30.723,136.016 h0.76 r270
D11: Top Overlay "K" at 85.968,135.635 h0.76 r270; Mechanical 15 "K" at 85.968,135.635 h0.76 r270
D14: Top Overlay "K" at 67.172,135.635 h0.76 r270; Mechanical 15 "K" at 67.172,135.635 h0.76 r270
R14: Top Overlay "Relay" at 104.383,155.828 h1.52 r270
R15: Top Overlay "Relay" at 49.138,155.828 h1.52 r270
R22: Top Overlay "Relay" at 30.85,155.828 h1.52 r270
R23: Top Overlay "Relay" at 86.222,155.828 h1.52 r270
R27: Top Overlay "Relay" at 67.299,155.828 h1.52 r270
U1: Top Overlay "LPCXpresso 1769" at 96.509,72.516 h1.52 r180